# Altium PCB Arduino UNO R3 shield - full.pcbdoc
Units mm, origin at the board's own origin, x right, y up, seen from the top; angles counter-clockwise.
Board outline 68.55 x 53.38 mm, 2 copper layers (Top Layer, Bottom Layer); 26 components, 50 nets, 110 pads, 0 vias.
Unrouted connection lines stored in the file: 40.
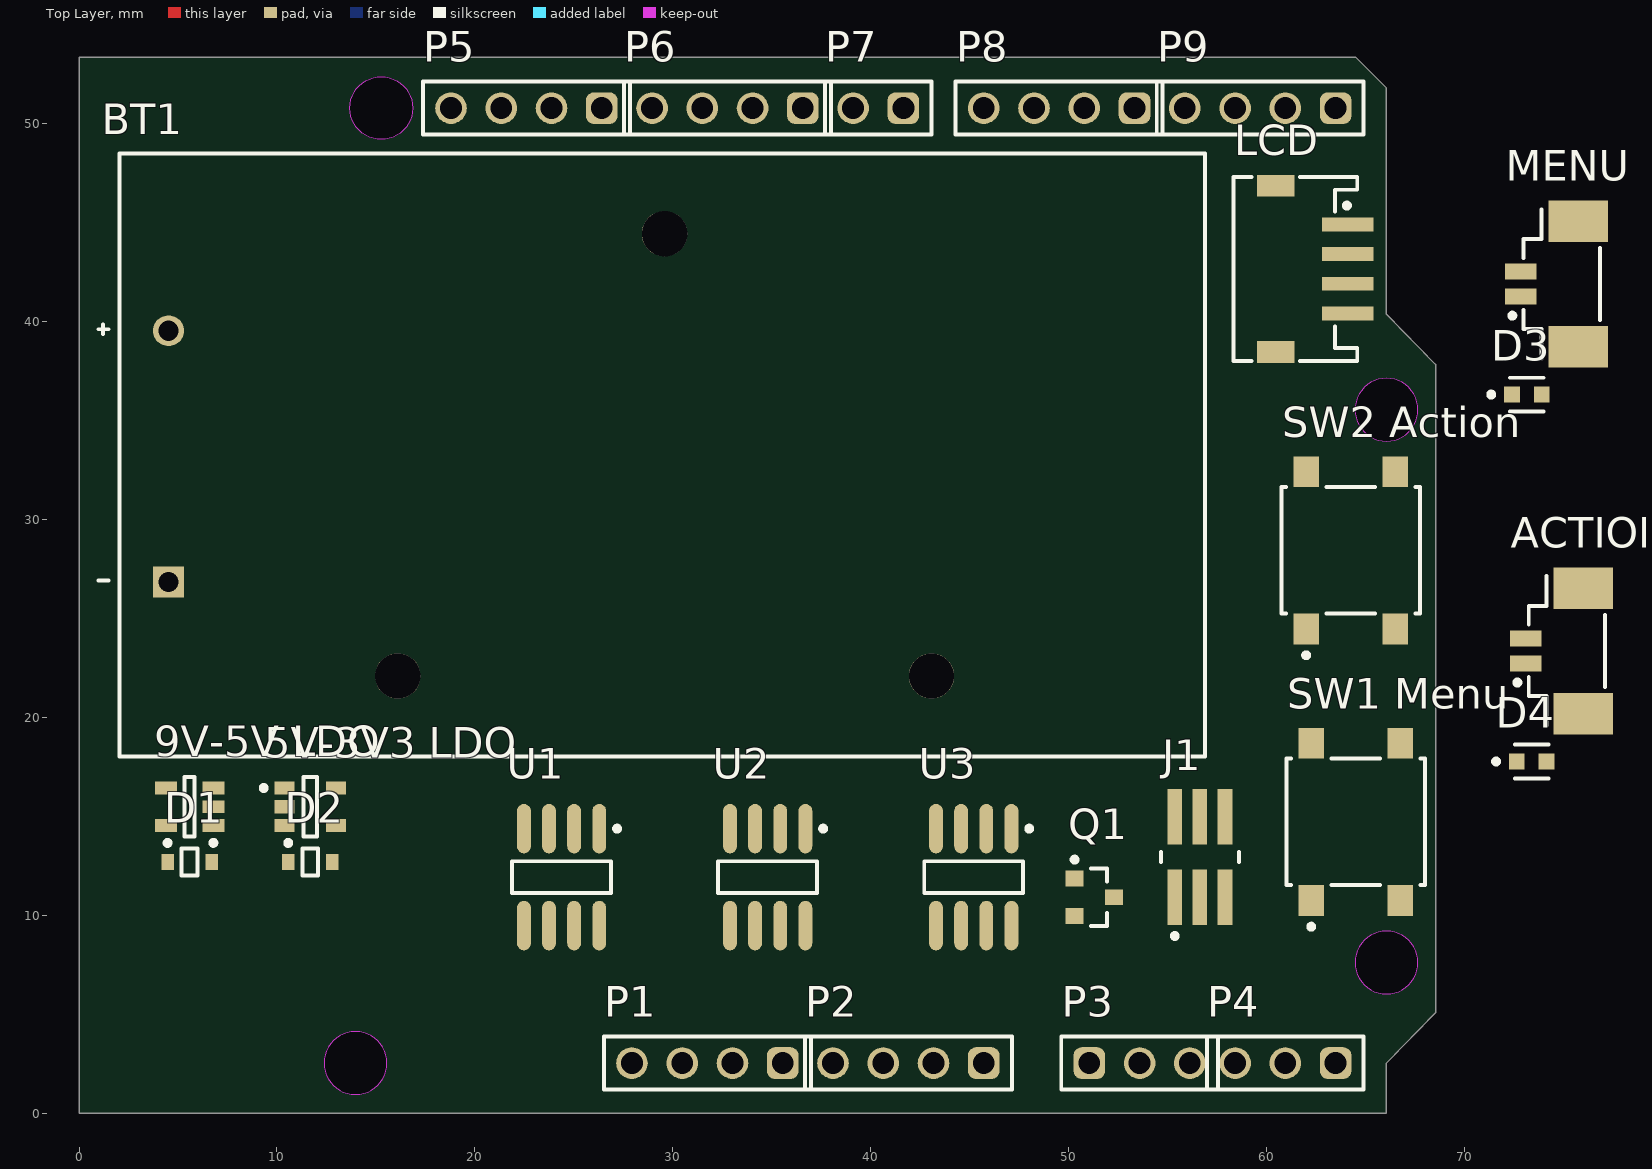
[diagram p0: Top Layer view]
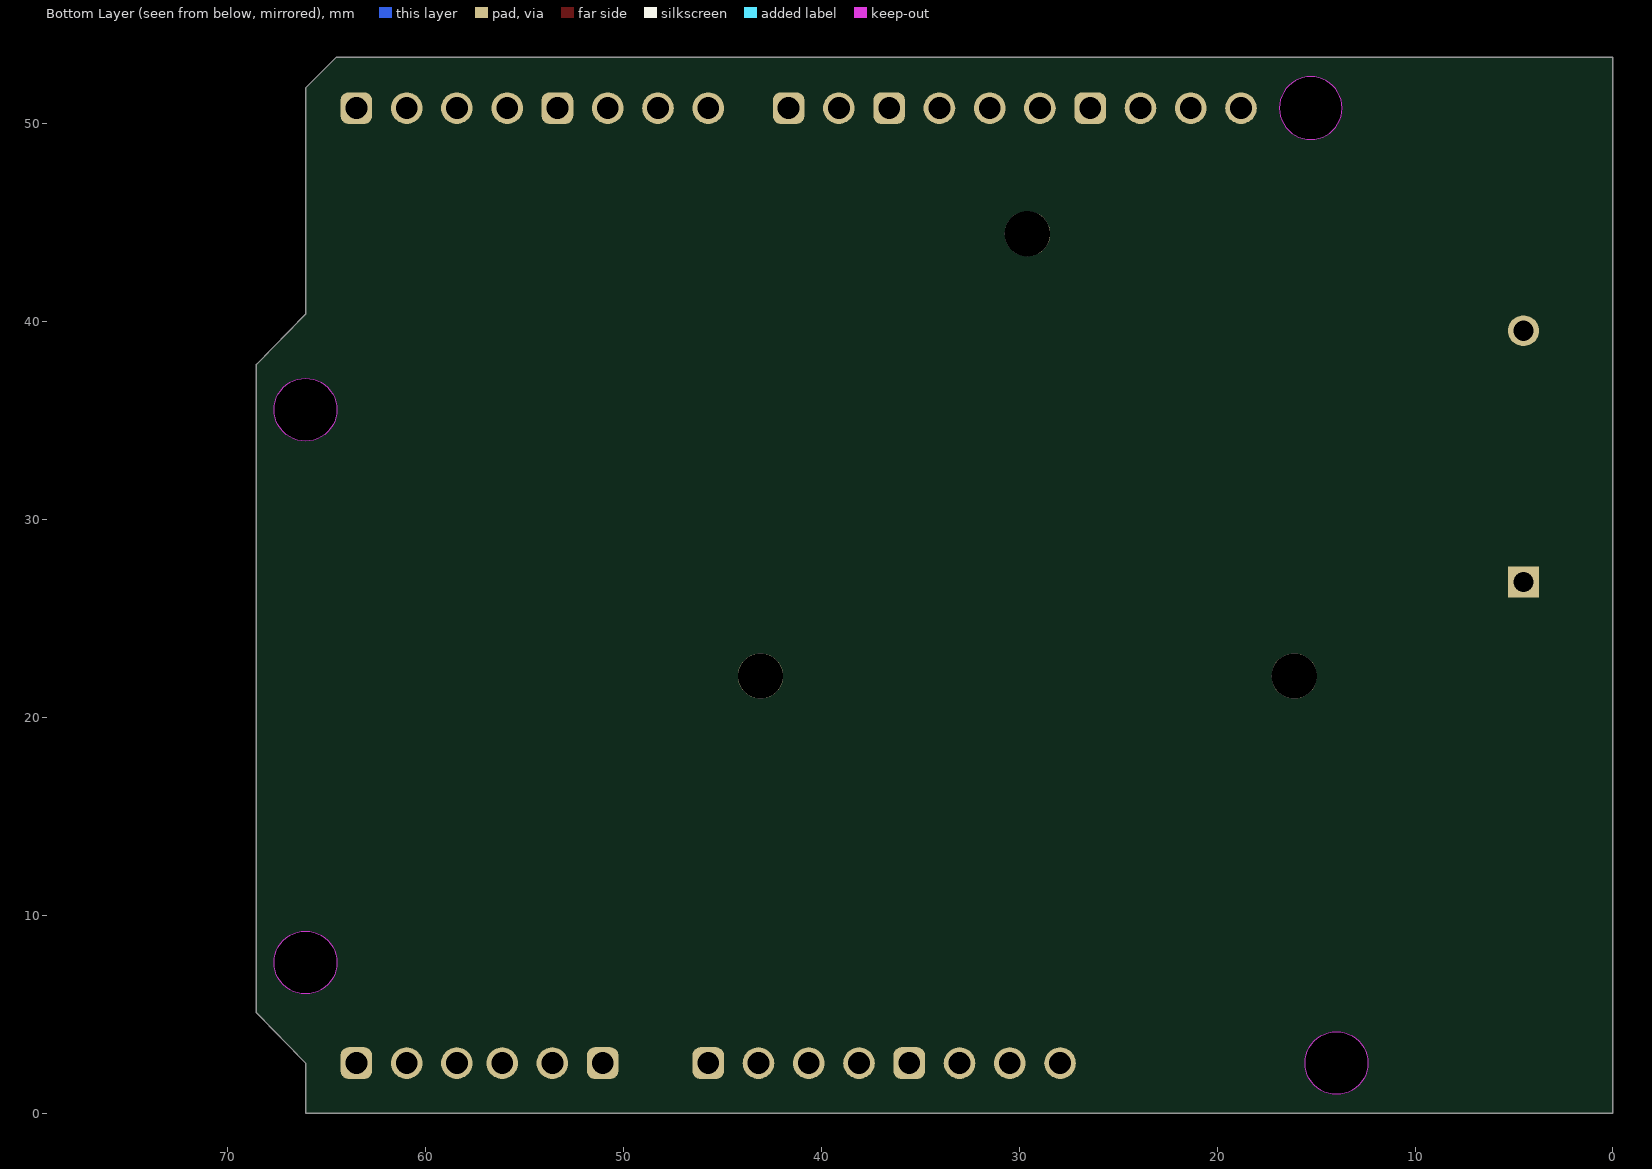
[diagram p1: Bottom Layer view, seen from below]

## Layer stack, top to bottom
Top Solder: solder mask 0.0102, Solder Resist, Dk 3.5
Top Layer: signal copper 0.0356
Dielectric1: dielectric 0.32, FR-4, Dk 4.8
Bottom Layer: signal copper 0.0356
Bottom Solder: solder mask 0.0102, Solder Resist, Dk 3.5

## Board outline
0,0 0,53.378 64.505,53.378 66.07,51.814 66.07,40.386 68.55,37.846 68.55,5.08 66.07,2.54 66.07,0
cut-out: 64.482,35.56 ccw(c66.07,35.56) 66.07,33.972 ccw(c66.07,35.56) 67.657,35.56 ccw(c66.07,35.56) 66.07,37.148 ccw(c66.07,35.56)
cut-out: 64.482,7.62 ccw(c66.07,7.62) 66.07,6.032 ccw(c66.07,7.62) 67.657,7.62 ccw(c66.07,7.62) 66.07,9.207 ccw(c66.07,7.62)
cut-out: 12.383,2.54 ccw(c13.97,2.54) 13.97,0.953 ccw(c13.97,2.54) 15.557,2.54 ccw(c13.97,2.54) 13.97,4.127 ccw(c13.97,2.54)
cut-out: 15.27,49.212 cw(c15.27,50.8) 13.682,50.8 cw(c15.27,50.8) 15.27,52.387 cw(c15.27,50.8) 16.857,50.8 cw(c15.27,50.8)

## Design rules (kind name [scope] priority, off if disabled: settings)
Clearance [All] p1: gap=0.254 ignorepadtopadclearanceinfootprint=FALSE
FabricationTestPointUsage TestPointUsage [All] p1: valid=0 allowmultiple=FALSE
FabricationTestpoint Testpoint [All] p1: side=3 testpointundercomponent=TRUE minsize=1.016 maxsize=2.54 preferedsize=1.524 minholesize=0 maxholesize=1.016 preferedholesize=0.813 testpointgrid=0.025 allowsidetop=TRUE allowsidebottom=TRUE usegrid=TRUE gridtolerance=0
PolygonConnect [All] p1: connectstyle=Relief reliefconductorwidth=0.254 reliefentries=4 polygonreliefangle="90 Angle" airgapwidth=0.254
RoutingVias [All] p1: holewidth=0.711 width=1.27 viastyle="Through Hole" minholewidth=0.711 minwidth=1.27 maxholewidth=0.711 maxwidth=1.27
SilkToSolderMaskClearance SilkscreenOverComponentPads [IsPad] p1: minsilkscreentomaskgap=0.254 clearancetoexposedcopper=TRUE
SolderMaskExpansion [All] p1: expansion=0.102 istentingtop=FALSE
Width [All] p1: maxlimit=0.254 minlimit=0.254 preferedwidth=0.254
27 further rules are at their usual default settings.

## Classes and differential pairs
component class ZFilter: C9 C10 R7 R8 U3
component class YFilter: C7 C8 R5 R6 U2
component class XFilter: C5 C6 R3 R4 U1
component class StepTracker: 3 ACTION LCD "SW1 Menu" "SW2 Action"
component class "ST Driver": Q1
component class Power: "5V-3V3 LDO" "9V-5V LDO" BT1 C1 C2 C3 C4 D1 D2 D3 D4 R1 R2 S1
component class Ardunio: P1 P2 P3 P4 P5 P6 P7 P8 P9
component class ADXL355: "C A.1" "C A.2" "C A.3" "C A.4" "C A.5" J1

## Components (designator, comment, footprint, x,y, rotation, side; value= is the part's Value field where it differs from the comment)
"5V-3V3 LDO" "MIC5504-3.3YM5-TR" FP-SOT23-5LD-PL-1-MFG 11.684,15.494 r0 top
"9V-5V LDO" "LK112SM50TR" SOT23-5L_N 5.588,15.494 r180 top
ACTION "653102124022" 653102124022 75.184,23.368 r90 top
BT1 "BH9VPC" FP-BH9VPC-MFG 29.464,33.274 r180 top
D1 "BAT54HT1G" ONSC-SOD-323-2-477-02_V 5.588,12.7 r0 top
D2 "BAT54HT1G" ONSC-SOD-323-2-477-02_V 11.684,12.7 r0 top
D3 "LTST-C190GKT" FP-LTST-C190GKT-MFG 73.164,36.322 r0 top
D4 "LTST-C190GKT" FP-LTST-C190GKT-MFG 73.406,17.78 r0 top
J1 "FTSH-103-01-L-DV-TR" FP-FTSH-103-01-L-DV-TR-MFG 56.642,12.954 r0 top
LCD "648104131822" 648104131822 61.468,42.672 r270 top
MENU "653102124022" 653102124022 74.93,41.91 r90 top
P1 "61300411121" 61300411121 31.75,2.54 r180 top
P2 "61300411121" 61300411121 41.91,2.54 r180 top
P3 "61300311121" 61300311121 53.594,2.54 r0 top
P4 "61300311121" 61300311121 60.96,2.54 r180 top
P5 "61300411121" 61300411121 22.606,50.8 r180 top
P6 "61300411121" 61300411121 32.766,50.8 r180 top
P7 "61300211121" 61300211121 40.386,50.8 r180 top
P8 "61300411121" 61300411121 49.53,50.8 r180 top
P9 "61300411121" 61300411121 59.69,50.8 r180 top
Q1 "NTR1P02T1G" ONSC-SOT-23-3-318-08_V 51.308,10.922 r0 top
"SW1 Menu" "B3S-1000P" FP-B3S-1000P-MFG 64.516,14.732 r90 top
"SW2 Action" "B3S-1000P" FP-B3S-1000P-MFG 64.262,28.448 r90 top
U1 "MCP6002-I/SN" SOIC-SN8_M 24.384,11.938 r270 top
U2 "MCP6002-I/SN" SOIC-SN8_M 34.798,11.938 r270 top
U3 "MCP6002-I/SN" SOIC-SN8_M 45.212,11.938 r270 top

## Footprints (in the part's own frame and the unit in brackets; to place one, negate y for a bottom-side part, rotate by r counter-clockwise, add the part's x,y. Pads: shape width x height; smd on the part's side, far side on the other; paste and mask are expansions set on the pad)
61300211121 [mm] "Pin Header, pitch 2.54 mm, THT, Vertical, single row, 2p"
  rrect50% 1.6x1.6 hole 1.1: 1(-1.27,0)
  round 1.6 hole 1.1: 2(1.27,0)
  silkscreen extent -2.69,-1.35 2.69,1.35, body extent -2.54,-1.27 2.54,1.27, height 8.57
61300311121 [mm] "Pin Header, pitch 2.54 mm, THT, Vertical, single row, 3p"
  rrect50% 1.6x1.6 hole 1.1: 1(-2.54,0)
  round 1.6 hole 1.1: 2(0,0) 3(2.54,0)
  silkscreen extent -3.96,-1.35 3.96,1.35, body extent -3.81,-1.27 3.81,1.27, height 8.57
61300411121 [mm] "Pin Header, pitch 2.54 mm, THT, Vertical, single row, 4p"
  rrect50% 1.6x1.6 hole 1.1: 1(-3.81,0)
  round 1.6 hole 1.1: 2(-1.27,0) 3(1.27,0) 4(3.81,0)
  silkscreen extent -5.23,-1.35 5.23,1.35, body extent -5.08,-1.27 5.08,1.27, height 8.57
648104131822 [mm] "1.50mm SMT Male Horizontal Shrouded Header, 4p"
  rect 0.7x2.6 smd: 1(-2.25,2.65) 2(-0.75,2.65) 3(0.75,2.65) 4(2.25,2.65)
  rect 1.1x1.9 smd: MP1(-4.2,-1) MP2(4.2,-1)
  silkscreen extent -4.65,-3.13 4.65,3.13, body extent -4.6,-3 4.6,3.47, height 3.74
653102124022 [mm] "1.25mm SMT Male Vertical Shrouded Header, 2p"
  rect 0.81x1.6 smd: 1(-0.625,2.07) 2(0.625,2.07)
  rect 2.1x3 smd: MP1(-3.175,-0.83) MP2(3.175,-0.83)
  silkscreen extent -3.77,-1.92 3.77,2.62, body extent -3.72,-1.85 3.72,2.36, height 4.74
FP-B3S-1000P-MFG [mm]
  rect 1.55x1.3 smd paste+0 mask+0: 1(-3.975,2.25) 2(3.975,2.25) 3(-3.975,-2.25) 4(3.975,-2.25)
  silkscreen extent -5.42,-3.5 3.2,3.5, body extent -4.85,-3.6 4.85,3.6, height 0.25
FP-BH9VPC-MFG [mil]
  rect 61.65x61.65 hole 40 paste-99999 mask+0: 1(982,253)
  round 61.65 hole 40 paste-99999 mask+0: 2(982,-247)
  round 90.16 hole 90.16 unplated paste-99999 mask+0: ""(-536,440) ""(-5,-440) ""(526,440)
  silkscreen extent -1080,-600 1121,600, body extent -1084,-604 1084,604, height 10
FP-FTSH-103-01-L-DV-TR-MFG [mm]
  rect 0.74x2.79 smd paste+0 mask+0: 1(-1.27,-2.035) 2(-1.27,2.035) 3(0,-2.035) 4(0,2.035) 5(1.27,-2.035) 6(1.27,2.035)
  silkscreen extent -1.97,-4.11 1.97,0.27, body extent -2.07,-3.53 2.07,3.53, height 0.25
FP-LTST-C190GKT-MFG [mm]
  rect 0.8x0.8 smd paste+0 mask+0: 1(-0.75,0) 2(0.75,0)
  silkscreen extent -1.92,-0.85 0.85,0.85, body extent -1.25,-0.55 1.25,0.55, height 0.25
FP-SOT23-5LD-PL-1-MFG [mm]
  rect 1x0.66 smd paste+0 mask+0: 1(-1.3,0.95) 2(-1.3,0) 3(-1.3,-0.95) 4(1.3,-0.95) 5(1.3,0.95)
  silkscreen extent -2.47,-1.5 0.35,1.5, body extent -1.9,-1.6 1.9,1.6, height 0.25
ONSC-SOD-323-2-477-02_V [mm] "SOD, 2-Leads, Body 1.7x1.25mm"
  rect 0.63x0.83 smd: 1(-1.115,0) 2(1.115,0)
  silkscreen extent -1.24,-0.67 0.4,1.09, body extent -0.85,-0.63 0.85,0.63, height 1.06
ONSC-SOT-23-3-318-08_V [mm] "SOT23, 3-Leads, Body 2.92x1.3mm, Pitch 0.95mm"
  rect 0.9x0.8 smd: 1(-1,0.95) 2(-1,-0.95) 3(1,0)
  silkscreen extent -1.12,-1.46 0.65,2.02, body extent -0.65,-1.46 0.65,1.46, height 1.11
SOIC-SN8_M [mm] "SOIC, 8-Leads, Body 4.9x3.9mm, Pitch 1.27mm, IPC Low Density"
  oval 2.5x0.7 smd: 1(-2.45,1.905) 2(-2.45,0.635) 3(-2.45,-0.635) 4(-2.45,-1.905) 5(2.45,-1.905) 6(2.45,-0.635) 7(2.45,0.635) 8(2.45,1.905)
  silkscreen extent -2.57,-2.5 0.8,2.93, body extent -2,-2.5 2,2.5, height 1.75
SOT23-5L_N [mm] "SOT23, 5-Leads, Body 2.9x1.6mm, Pitch 0.95mm, Lead Span 2.8mm, IPC Medium Density"
  rect 1.1x0.65 smd: 1(-1.2,0.95) 2(-1.2,0) 3(-1.2,-0.95) 4(1.2,-0.95) 5(1.2,0.95)
  silkscreen extent -1.33,-1.5 0.25,1.95, body extent -0.87,-1.5 0.87,1.5, height 1.45

## Part data
"5V-3V3 LDO": library part CMP-2000-07604-2, "IC REG LINEAR 3.3V 300MA SOT23-5", Case/Package=SOT-23-5, Dropout Voltage=380mV, Max Input Voltage=5.5V, Max Operating Temperature=125°C, Max Output Current=300mA, Min Input Voltage=2.5V, Min Operating Temperature=-40°C, Nominal Output Voltage=3.3V, Operating Supply Current=42uA, Power Supply Rejection Ratio (PSRR)=60dB, Quiescent Current=38uA, Accuracy=3%, Height=1.1mm, Length=2.9mm, Mount="Surface Mount", Number of Outputs=1, Number of Pins=5, Output Current=300mA, Output Type=Fixed, Output Voltage=3.3V, Packaging="Tape and Reel", REACH SVHC="No SVHC", Width=1.6mm
"9V-5V LDO": library part CMP-0244-00331-1, "200mA, Low Noise Low Drop Voltage Regulator with Shutdown Function, 5V, 5-Pin SOT23-5L, Tape and Reel", ComponentLink1Description="Manufacturer URL", ComponentLink1URL=http://www.st.com, ComponentLink2Description=Datasheet, ComponentLink2URL=http://www.st.com/internet/com/TECHNICAL_RESOURCES/TECHNICAL_LITERATURE/DATASHEET/CD00002558.pdf, DatasheetVersion=10/07/2008, PackageDescription="5-Pin SOT-23 Package, 2.9 x 1.6 mm Body, 0.95 mm Pitch, 2.8 mm Lead Span", PackageReference=SOT23-5L, PackageVersion=1/01/2008
ACTION MENU: library part CMP-1502-00757-2, Color="Beige, White", Contact Resistance=20mΩ, Current Rating=1A, Flammability Rating="UL94 V-0", Insulation Resistance=100MΩ, Max Operating Temperature=85°C, Min Operating Temperature=-40°C, Operating Supply Voltage=125V, Connector Type="Male Pin", Contact Gender=Male, Contact Material=Copper, Contact Mating Length=2.159mm, Contact Plating=Tin, Gender=Male, Height=4.75mm, Housing Material=Nylon, Insulation=Insulated, Lead Pitch=1.25mm, Length=7.25mm, Mount="Surface Mount", NexarPartId=18818273, Number of Contacts=2, Number of Pins=2, Number of Positions=2, Number of Rows=1, Orientation=Vertical, Packaging="Tape and Reel", Pitch=1.25mm, REACH SVHC=Unknown, RoHS=Compliant, Termination=SMD/SMT, Voltage Rating=125V, Width=7.25mm
BT1: library part CMP-136216-000001-1, "BATTERY HOLDER 9V PC PIN", Manufacturer="Memory Protection Devices", Package=0, Voltage Rating=9V, Automotive=No, Category=Batt, ComponentLink2Description=Datasheet, ComponentLink2URL=http://www.memoryprotectiondevices.com/datasheets/BH9VPC-datasheet.pdf, Conn Orientation=Vertical, Contact Material=Nickel, Device Class L1=Connectors, Device Class L2=unset, Device Class L3=unset, Digikey Description="BATTERY HOLDER 9V PC PIN", Height=21.12mm, Is Female=yes, Lead Free=Yes, Manufacturer Part Number=BH9VPC, Number of Contacts=2, Octopart=https://octopart.com/bh9vpc-memory+protection+devices-22788154, RoHS=TRUE
D1 D2: library part CMP-1055-00462-1, "Schottky Barrier Diode, 2-Pin SOD-323, Pb-Free, Tape and Reel", Manufacturer="On Semiconductor", ComponentLink1Description="Manufacturer URL", ComponentLink1URL=http://www.onsemi.com/, ComponentLink2Description=Datasheet, ComponentLink2URL=http://www.onsemi.cn/pub_link/Collateral/BAT54HT1-D.PDF, ComponentLink3Description="Package Specification", ComponentLink3URL=http://www.onsemi.com/pub_link/Collateral/477-02.PDF.1, Configuration=Single, DatasheetVersion="Rev. 6", IFSM Max (A)=0.6, Mounting Technology="Surface Mount", PackageDescription="2-Pin SOD, Body 1.7 x 1.25 mm", PackageReference=SOD-323-2-477-02, PackageVersion="Rev. H, 03/2007", Packing="Tape and Reel", PartNumber=BAT54HT1G, RoHS=TRUE, trr Max (ns)=5
D3 D4: library part CMP-22017-000005-2, "LED GREEN CLEAR CHIP SMD", Case Code (Imperial)=0603, Case Code (Metric)=1608, Color=Green, Forward Current=30mA, Forward Voltage=2.1V, Lens Color=Colorless, Max Operating Temperature=85°C, Min Operating Temperature=-55°C, Package Quantity=1, Power Dissipation=100mW, Reverse Voltage=5V, Test Current=10mA, Voltage=2V, Case/Package=0603, Depth=0.8mm, Dominant Wavelength=569nm, Height=0.8mm, Illumination Color=Green, Lead Free="Lead Free", Length=1.6mm, Lens Style=Clear, Lens Transparency=Clear, Luminous Intensity=6mcd, Mount="Surface Mount", Number of Elements=1, Number of LEDs=1, Number of Pins=2, Packaging="Tape and Reel", Power Rating=100mW, Radiation Hardening=No, Viewing Angle=130°, Wavelength=565nm, Width=0.8mm
J1: library part CMP-00575-09268061-1, "FTSH-103-01-L-DV-TR Conn, Header, 6Pos, 2Row, 1.27Mm Rohs Compliant: Yes", Current Rating=3.4A, Housing Color=Black, Manufacturer Lifecycle Status=PRODUCTION, Max Current Rating=1.75A, Max Operating Temperature=125°C, Min Operating Temperature=-55°C, Contact Material="Bronze, Gold, Nickel", Contact Plating=Gold, Depth=3.43mm, Gender=Male, Height=6.23mm, Housing Material=Polymer, Lead Free="Lead Free", Length=3.81mm, Lifecycle Status=Production, NexarPartId=9268061, Number of Contacts=6, Number of Rows=2, Orientation=Straight, Packaging="Tape and Reel", Pitch=1.27mm, Radiation Hardening=No, REACH SVHC="No SVHC", RoHS=Compliant, Termination=Solder
LCD: library part CMP-1502-00732-2, Color="Beige, White", Contact Resistance=20mΩ, Current Rating=1A, Flammability Rating="UL94 V-0", Insulation Resistance=500MΩ, Max Operating Temperature=85°C, Min Operating Temperature=-25°C, Operating Supply Voltage=50V, Connector Type="Male Pin", Contact Gender=Male, Contact Material=Copper, Contact Plating=Tin, Gender=Male, Height=3.7mm, Housing Material=Nylon, Insulation=Insulated, Lead Pitch=1.5mm, Length=9mm, Mount="Surface Mount", NexarPartId=18818253, Number of Contacts=4, Number of Pins=4, Number of Positions=4, Number of Rows=1, Packaging="Tape and Reel", Pitch=1.5mm, REACH SVHC=Unknown, RoHS=Compliant, Termination=SMD/SMT, Voltage Rating=50V, Width=9mm
P1 P2 P5 P6 P8 P9: library part CMP-1502-01064-2, Color=Black, Contact Resistance=20mΩ, Current Rating=3A, Max Operating Temperature=105°C, Min Operating Temperature=-40°C, Operating Supply Voltage=250V, Connector Type="Male Pin", Contact Material=Copper, Contact Mating Length=5.9944mm, Contact Plating=Gold, Gender=Male, Height=8.89mm, Lead Free="Lead Free", Lead Pitch=2.54mm, Mount="Through Hole", NexarPartId=32855522, Number of Contacts=4, Number of Pins=4, Number of Positions=4, Number of Rows=1, Orientation=Vertical, Packaging=Bulk, Pitch=2.54mm, REACH SVHC=Unknown, RoHS=Compliant, Termination=Solder, Voltage Rating=250V
P3 P4: library part CMP-1502-01062-2, Color=Black, Contact Resistance=20mΩ, Current Rating=3A, Max Operating Temperature=105°C, Min Operating Temperature=-40°C, Operating Supply Voltage=250V, Connector Type="Male Pin", Contact Material=Copper, Contact Mating Length=5.9944mm, Contact Plating=Gold, Gender=Male, Height=8.94mm, Lead Free="Lead Free", Lead Pitch=2.54mm, Mount="Through Hole", NexarPartId=32855521, Number of Contacts=3, Number of Pins=3, Number of Positions=3, Number of Rows=1, Orientation=Vertical, Packaging=Bulk, Pitch=2.54mm, REACH SVHC=Unknown, RoHS=Compliant, Termination=Solder, Voltage Rating=250V
P7: library part CMP-1712-00002-5, Color=Black, Contact Resistance=20mΩ, Current Rating=3A, Max Operating Temperature=125°C, Min Operating Temperature=-40°C, Operating Supply Voltage=250V, Connector Type="Male Pin", Contact Gender=Male, Contact Material=Copper, Contact Mating Length=5.9944mm, Contact Plating=Gold, Gender=Male, Height=8.94mm, Housing Material=PBT, Lead Free="Lead Free", Lead Pitch=2.54mm, Mount="Through Hole", NexarPartId=20081794, Number of Contacts=2, Number of Pins=2, Number of Positions=2, Number of Rows=1, Orientation=Vertical, Packaging=Bulk, Pitch=2.54mm, REACH SVHC="No SVHC", RoHS=Compliant, Termination="Through Hole", Voltage Rating=250V
Q1: library part CMP-1058-00751-1, "Power MOSFET, -20 V, -1 A, P-Channel, 3-Pin SOT-23, Pb-Free, Tape and Reel", Manufacturer="On Semiconductor", Package Type=SOT-23-3, Channel Polarity="P Channel", Ciss Typ (pF)=165, ComponentLink1Description="Manufacturer URL", ComponentLink1URL=http://www.onsemi.com/, ComponentLink2Description=Datasheet, ComponentLink2URL=http://www.onsemi.cn/pub_link/Collateral/NTR1P02T1-D.PDF, ComponentLink3Description="Package Specification", ComponentLink3URL=http://www.onsemi.cn/pub_link/Collateral/318-08.PDF, Configuration=Single, Coss Typ (pF)=110, Crss Typ (pF)=35, DatasheetVersion="Rev. 7", ID Max (A)=1, Mounting Technology="Surface Mount", PackageDescription="3-Pin Small Outline Transistor, Body 2.92 x 1.3 mm, Pitch 0.95 mm", PackageReference=SOT-23-3-318-08, PackageVersion="Rev. AP, 11/2009", Packing="Tape and Reel", PartNumber=NTR1P02T1G, PD Max (W)=0.4, Qrr Typ (nC)=8, RoHS=Pb-Free, V(BR)DSS Min (V)=20, VGS Max (V)=20, VGS(th) Max (V)=2.3
"SW1 Menu" "SW2 Action": library part CMP-08834-000008-1, "SWITCH TACTILE SPST-NO 0.05A 24V", Contact Current Rating=50mA, Contact Resistance=100mR, Max Operating Temperature=70°C, Max Voltage Rating (DC)=24V, Min Operating Temperature=-25°C, Operating Force=1.57N, Package Quantity=1, Ratings=IP67, Actuator Length=0.8mm, Actuator Type=Standard, Contact Material=Bronze, Contact Plating=Silver, Current Rating=50mA, Depth=9mm, Electrical Life=500000Cycles, Height=3.65mm, Illumination Type=Non-Illuminated, Lead Free="Lead Free", Length=6.6mm, Max Current Rating=50mA, Mechanical Life=500000Cycles, Mount="Surface Mount", Number of Poles=1, Orientation=Straight, Packaging="Tape and Reel", Radiation Hardening=No, REACH SVHC="No SVHC", Switch Function=Off-Mom, Switch Travel=0.25mm, Termination="Gull Wing", Throw Configuration=SPST, Voltage Rating (DC)=24V, Weight=0.010582oz, Width=6mm
U1 U2 U3: library part CMP-0187-00365-3, "None", Case/Package=SOIC, Input Bias Current=1pA, Input Offset Voltage (Vos)=4.5mV, Max Operating Temperature=85°C, Max Supply Voltage=6V, Min Operating Temperature=-40°C, Min Supply Voltage=1.8V, Nominal Supply Current=100uA, Operating Supply Voltage=5.5V, Output Current=23mA, Package Quantity=100, Power Supply Rejection Ratio (PSRR)=86dB, Voltage Gain=112dB, Amplifier Type="GENERAL PURPOSE", Bandwidth=1MHz, Common Mode Rejection Ratio=60dB, Gain Bandwidth Product=1MHz, Height=1.25mm, Input Offset Voltage-Max=4.5mV, Lead Free="Lead Free", Length=4.9mm, Mount="Surface Mount", Number of Amplifiers=2, Number of Channels=2, Number of Circuits=2, Number of Elements=2, Number of Pins=8, Packaging=Rail/Tube, Radiation Hardening=No, REACH SVHC="No SVHC", RoHS Compliant=Yes, Slew Rate=0.6V/µs, Slew Rate-Nom=0.6V/µs, Supply Current=100uA, Technology=CMOS, Unity Gain Bandwidth Product=1MHz, Width=3.9mm

## Nets (pads, with @x,y where several pads share a name; then routed paths per layer and width w, separated by ;. In a path a pad name is that pad's centre, name@x,y a point inside that pad or via, vN(x,y) a via of type N, cw(c..) or ccw(c..) an arc to the next point about the centre after c; other vN are vias at no path point)
+3V3: "5V-3V3 LDO.5" D2.2 J1.5 Q1.2
+5V: "5V-3V3 LDO.1" "5V-3V3 LDO.3" "9V-5V LDO.4" D1.2 D2.1 LCD.1 U1.8 U2.8 U3.8
"Action Button": "SW2 Action.1" P9.1
GND: "5V-3V3 LDO.2" "9V-5V LDO.2" "SW1 Menu.4" "SW2 Action.4" ACTION.1 BT1.1 D3.1 D4.1 J1.3 LCD.4 MENU.1 U1.4 U2.4 U3.4
"Menu Button": "SW1 Menu.1" P9.2
NetACTION_2: "SW2 Action.2" ACTION.2
NetBT1_2: BT1.2
NetC5_1: 
NetC5_2: P3.1 U1.1 U1.2
NetC6_2: U1.3
NetC7_1: 
NetC7_2: P3.2 U2.1 U2.2
NetC8_2: U2.3
NetC9_1: 
NetC9_2: P3.3 U3.1 U3.2
NetC10_2: U3.3
NetD3_2: D3.2
NetD4_2: D4.2
NetLCD_2: LCD.2 P5.1
NetLCD_3: LCD.3 P5.2
NetMENU_2: "SW1 Menu.2" MENU.2
NetP1_1: P1.1
NetP1_2: P1.2
NetP1_3: P1.3
NetP1_4: P1.4
NetP2_1: P2.1
NetP2_2: P2.2
NetP2_3: P2.3
NetP4_1: P4.1
NetP4_2: P4.2
NetP4_3: P4.3
NetP5_3: P5.3
NetP5_4: P5.4
NetP6_1: P6.1
NetP6_2: P6.2
NetP6_3: P6.3
NetP6_4: P6.4
NetP7_1: P7.1
NetP7_2: P7.2
NetP8_1: P8.1
NetP8_2: P8.2
NetP8_3: P8.3
NetP8_4: P8.4 Q1.1
NetP9_3: P9.3
NetP9_4: P9.4
"ST signal": J1.1 Q1.3
VCC: "9V-5V LDO.1" "9V-5V LDO.5" D1.1
"x signal": J1.2
"y signal": J1.4
"z signal": J1.6
pads on no net: "5V-3V3 LDO.4" "9V-5V LDO.3" "SW1 Menu.3" "SW2 Action.3" ACTION.MP1 ACTION.MP2 BT1. LCD.MP1 LCD.MP2 MENU.MP1 MENU.MP2 P2.4 U1.5 U1.6 U1.7 U2.5 U2.6 U2.7 U3.5 U3.6 U3.7

## Silkscreen, mask and mechanical layers (free items; w line width, h text height)
Mechanical 1:
  circle w0.013: c18.826,50.8 r0.254
  circle w0.013: c21.366,50.8 r0.254
  circle w0.013: c23.906,50.8 r0.254
  circle w0.013: c26.446,50.8 r0.254
  circle w0.013: c28.986,50.8 r0.254
  circle w0.013: c31.526,50.8 r0.254
  circle w0.013: c34.066,50.8 r0.254
  circle w0.013: c36.606,50.8 r0.254
  circle w0.013: c39.146,50.8 r0.254
  circle w0.013: c41.686,50.8 r0.254
  circle w0.013: c45.72,50.8 r0.254
  circle w0.013: c48.26,50.8 r0.254
  circle w0.013: c50.8,50.8 r0.254
  circle w0.013: c53.34,50.8 r0.254
  circle w0.013: c55.88,50.8 r0.254
  circle w0.013: c58.42,50.8 r0.254
  circle w0.013: c60.96,50.8 r0.254
  circle w0.013: c63.5,50.8 r0.254
  circle w0.013: c27.94,2.54 r0.254
  circle w0.013: c30.48,2.54 r0.254
  circle w0.013: c33.02,2.54 r0.254
  circle w0.013: c35.56,2.54 r0.254
  circle w0.013: c38.1,2.54 r0.254
  circle w0.013: c40.64,2.54 r0.254
  circle w0.013: c43.18,2.54 r0.254
  circle w0.013: c45.72,2.54 r0.254
  circle w0.013: c50.8,2.54 r0.254
  circle w0.013: c53.594,2.54 r0.254
  circle w0.013: c55.88,2.54 r0.254
  circle w0.013: c58.42,2.54 r0.254
  circle w0.013: c60.96,2.54 r0.254
  circle w0.013: c63.5,2.54 r0.254
  circle w0.013: c13.97,2.54 r1.587
  circle w0.013: c66.07,7.62 r1.587
  circle w0.013: c66.07,35.56 r1.587
  circle w0.013: c15.27,50.8 r1.587
  lines w0.013: 0,0 0,53.378 64.505,53.378 66.07,51.814 66.07,40.386 68.55,37.846 68.55,5.08 66.07,2.54 66.07,0 0,0
Mechanical 16:
  lines w0.127: -94.488,-34.29 -89.408,-34.29 ; -94.488,13.97 -89.408,13.97 ; -94.488,62.23 -89.408,62.23 ; -21.463,-82.55 -21.463,-77.47 ; -21.463,105.41 -21.463,110.49 ; 42.672,-77.47 78.232,-77.47 ; 51.562,-82.55 51.562,-77.47 ; 51.562,105.41 51.562,110.49 ; 78.232,-69.85 192.532,-69.85 ; 78.232,-62.23 192.532,-62.23 ; 78.232,-54.61 116.332,-54.61 ; 116.332,-77.47 116.332,-62.23 116.332,-46.99 ; 124.587,-82.55 124.587,-77.47 ; 124.587,105.41 124.587,110.49 ; 169.672,-77.47 169.672,-62.23 ; 192.532,-34.29 197.612,-34.29 ; 192.532,13.97 197.612,13.97 ; 192.532,62.23 197.612,62.23 ; 78.232,-77.47 192.532,-77.47 ; 78.232,-77.47 78.232,-46.99 116.332,-46.99 ; 116.332,-46.99 192.532,-46.99 192.532,-77.47 ; 192.532,-77.47 -89.408,-77.47 -89.408,105.41 192.532,105.41 192.532,-77.47 ; -94.488,-82.55 197.612,-82.55 197.612,110.49 -94.488,110.49 -94.488,-82.55
  text "1" at -58.242,107.061 h1.78
  text "2" at 14.402,107.061 h1.78
  text "3" at 87.554,107.061 h1.78
  text "4" at 160.452,107.061 h1.78
  text "A" at -92.583,84.049 h1.78
  text "A" at 194.437,84.049 h1.78
  text "B" at -92.583,35.992 h1.78
  text "B" at 194.437,35.992 h1.78
  text "C" at -92.583,-12.522 h1.78
  text "C" at 194.437,-12.522 h1.78
  text "ENGINEER:" at 79.502,-49.53 h1.14
  text "TITLE:" at 117.602,-49.53 h1.14
  text "PCB DESIGNER:" at 79.502,-57.023 h1.14
  text "D" at -92.583,-60.528 h1.78
  text "D" at 194.437,-60.528 h1.78
  text "DATE:" at 79.502,-64.77 h1.14
  text "PART NO.:" at 117.602,-64.77 h1.14
  text "REV:" at 170.942,-64.77 h1.14
  text ".PRINT_DATE" at 80.772,-67.818 h1.78
  text "FILE NAME:" at 79.502,-72.39 h1.14
  text "DWG NO:" at 117.602,-72.39 h1.14
  text "SCALE:" at 170.942,-72.39 h1.14
  text ".PCB_FILE_NAME_NO_PATH" at 80.772,-75.438 h1.78
  text "1" at -58.242,-80.899 h1.78
  text "2" at 14.402,-80.899 h1.78
  text "3" at 87.554,-80.899 h1.78
  text "4" at 160.452,-80.899 h1.78